# EAGLE board check_battery-programmer (EAGLE 9.6.2)
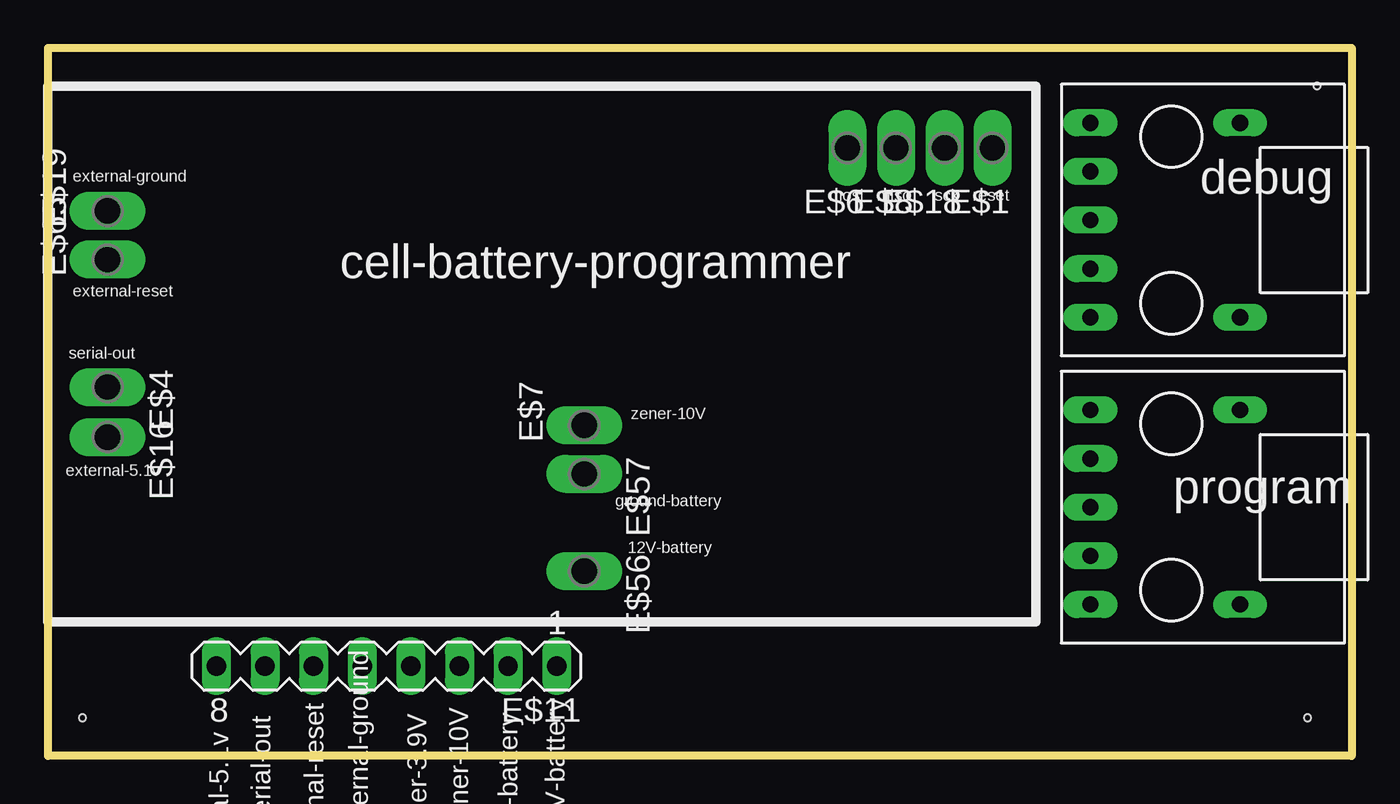
[diagram p0: board, top side]
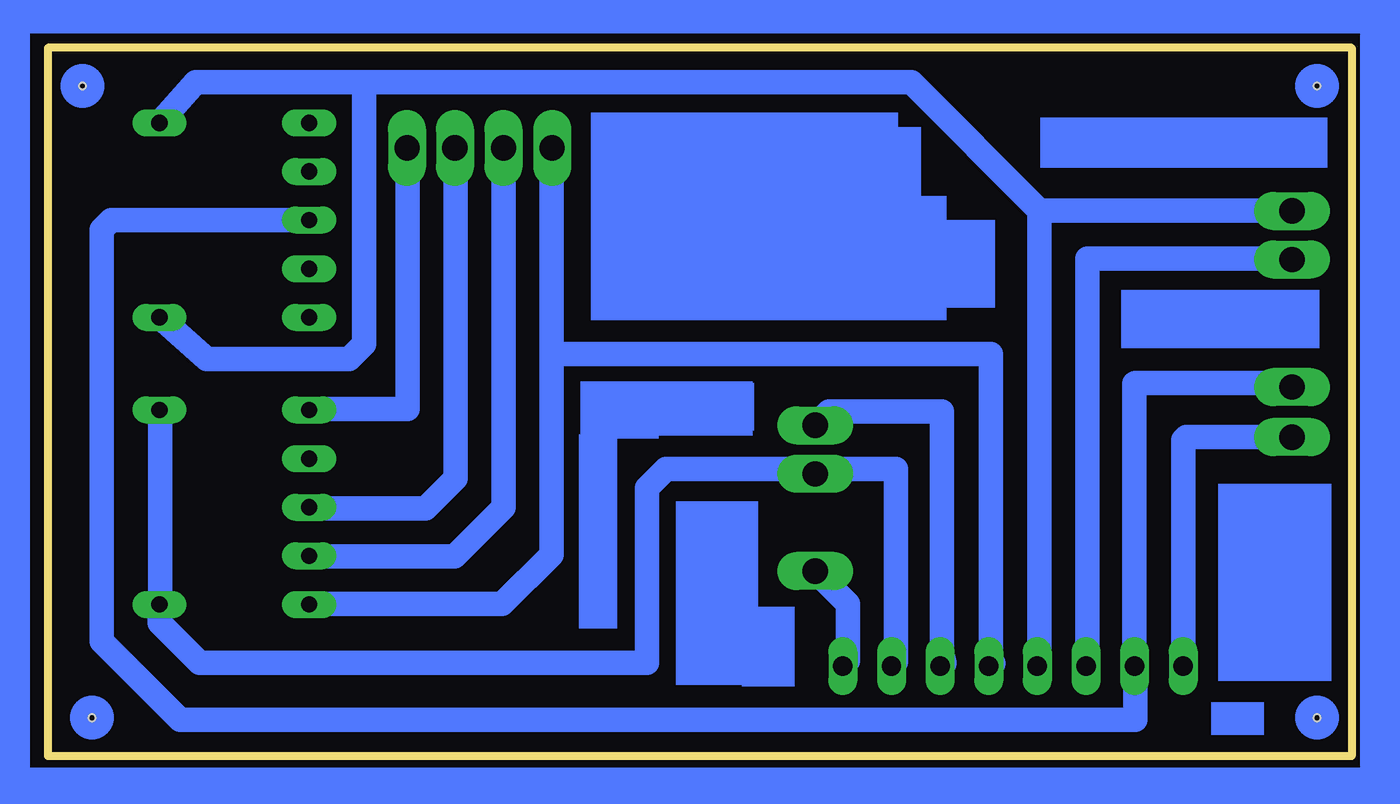
[diagram p1: board, bottom side, seen from below]

Size 68.1 x 37 mm. Coordinates in mm from the lower left corner, seen from the top.
Outline: 0,37 68.1,37 68.1,0 0,0 0,37
Copper layers (1*16): Top 0.035mm / dielectric 1.5mm / Bottom 0.035mm
Design rules "default *": minimum track width 20mil, minimum drill 24mil, track to track 8mil, track to pad 8mil, pad to pad 8mil, via to via 8mil, smd to smd 8mil, copper to edge 40mil, drill to drill 8mil, minimum pad ring 10mil, minimum via ring 8mil, stop-mask expansion 4mil, vias tented up to drill 0mil, thermal gap 10mil
Holes 0.35 mm at 1.8,35 1.8,2 65.8,2 66.3,35

## Footprints (pad centres in the part's own frame; a part is rotated, then mirrored left to right if it is on the bottom)
P1-13Y = drill 1.321 pad 1.905 long: TP 0,0
USB-MICRO-PCB = drill 0.85 pad 1.422 long: P$1 -5.08,6.35; P$2 -2.54,6.35; P$3 0,6.35; P$4 2.54,6.35; P$5 5.08,6.35; P$6 -5.08,-1.47; P$7 5.08,-1.47
MA08-1 = drill 1.016 long: 1 -8.89,0; 2 -6.35,0; 3 -3.81,0; 4 -1.27,0; 5 1.27,0; 6 3.81,0; 7 6.35,0; 8 8.89,0

## Placement (x,y rotation side)
E$1  [P1-13Y]  49.34,31.77 180 top
E$2  program  [USB-MICRO-PCB]  60.8,13 90 top
E$3  program  [USB-MICRO-PCB]  60.8,28 90 top
E$4  SERIAL OUT  [P1-13Y]  3.12,19.28 270 top
E$6  [P1-13Y]  41.76,31.77 180 top
E$7  [P1-13Y]  28.02,17.28 90 top
E$8  [P1-13Y]  44.3,31.77 180 top
E$11  [MA08-1]  17.69,4.7 180 top
E$16  [P1-13Y]  3.12,16.66 270 top
E$18  [P1-13Y]  46.84,31.77 180 top
E$19  in-ground  [P1-13Y]  3.12,28.48 90 top
E$56  [P1-13Y]  28.02,9.66 270 top
E$57  [P1-13Y]  28.02,14.74 270 top
E$65  [P1-13Y]  3.12,25.94 90 top

## Library data of the parts
E$1 E$4 E$6-E$8 E$16 E$18 E$19 E$56 E$57 E$65 = testpad
E$2 E$3 = LSGPackages
E$11 = con-lstb

## Nets
S$2: E$2.P$1 E$6.TP E$11.4
S$4: E$2.P$2 E$8.TP
S$5: E$2.P$3 E$18.TP
S$7: E$1.TP E$2.P$5
S$8: E$3.P$6 E$3.P$7 E$11.5 E$19.TP
S$9: E$3.P$3 E$4.TP E$11.7
S$10: E$2.P$6 E$2.P$7 E$11.2 E$57.TP
S$11: E$11.1 E$56.TP
S$12: E$7.TP E$11.3
S$13: E$11.6 E$65.TP
S$14: E$11.8 E$16.TP

## Tracks (layer width: path | path; a pad name or v marks a point on that pad's centre or on a via)
S$2
  Bottom 1.27: 41.8,21 41.8,10.5 44.36,7.94 54.42,7.94 E$2.P$1 | 41.8,21 41.8,31.5 E$6.TP | 41.8,21 18.85,21 18.85,5.11 18.8,5 | 18.8,5 18.72,4.84 | E$11.4 18.8,4.85 18.8,5
S$4
  Bottom 1.27: E$2.P$2 54.43,10.44 46.86,10.44 44.3,13 E$8.TP
S$5
  Bottom 1.27: E$2.P$3 54.39,12.94 48.36,12.94 46.8,14.5 46.8,31.73 E$18.TP
S$7
  Bottom 1.27: E$2.P$5 54.41,18.12 49.3,18.12 49.3,31.73 E$1.TP
S$8
  Bottom 1.27: 51.58,35.2 51.58,21.53 52.36,20.75 59.8,20.75 62.23,22.92 E$3.P$6 | 51.58,35.2 60.38,35.2 E$3.P$7 | E$19.TP 3.14,28.5 16.3,28.5 | 51.58,35.2 23,35.2 16.3,28.5 | 16.3,28.5 16.3,4.81 E$11.5
S$9
  Bottom 1.27: E$3.P$3 64.8,28 65.3,27.5 65.3,6 61.2,1.9 11.3,1.9 11.3,4.66 E$11.7 11.34,19.46 11.3,19.5 3.34,19.5 E$4.TP
S$10
  Bottom 1.27: 62.24,17.69 62.24,7.95 E$2.P$6 62.27,6.97 60.17,4.87 36.8,4.87 36.8,14 35.8,15 28.28,15 E$57.TP 27.76,15 23.8,15 23.8,4.93 E$11.2 | 62.3,18 E$2.P$7
S$11
  Bottom 1.27: E$11.1 26.3,4.97 26.3,7.94 E$56.TP
S$12
  Bottom 1.27: E$7.TP 27.3,18 21.4,18 21.4,5.45 21.3,5 | 21.3,5 21.26,4.84 | 21.3,5 21.3,4.89 E$11.3
S$13
  Bottom 1.27: E$65.TP 3.18,26 13.8,26 13.8,4.77 E$11.6
S$14
  Bottom 1.27: E$11.8 8.8,16.5 8.64,16.66 E$16.TP
(copper drawn outside any net)
  shapes: Bottom area x18, Bottom circle x4

## Text on the board
tPlace: external-ground | mosi | miso | sck | reset | debug | cell-battery-programmer | external-reset | serial-out | zener-10V | external-5.1v | ground-battery | program | 12V-battery | serial-out | zener-3.9V | ground-battery | external-5.1v | zener-10V | 12V-battery | external-ground | external-reset